# Altium PCB X3_Developer_RF_Sheet_V7.4.2_Sep2023.PcbDoc
Units mm, origin at the board's own origin, x right, y up, seen from the top; angles counter-clockwise.
Board outline 227.52 x 176.4 mm, 2 copper layers (Top Layer, Bottom Layer); 15 components, 0 nets, 38 pads, 0 vias.
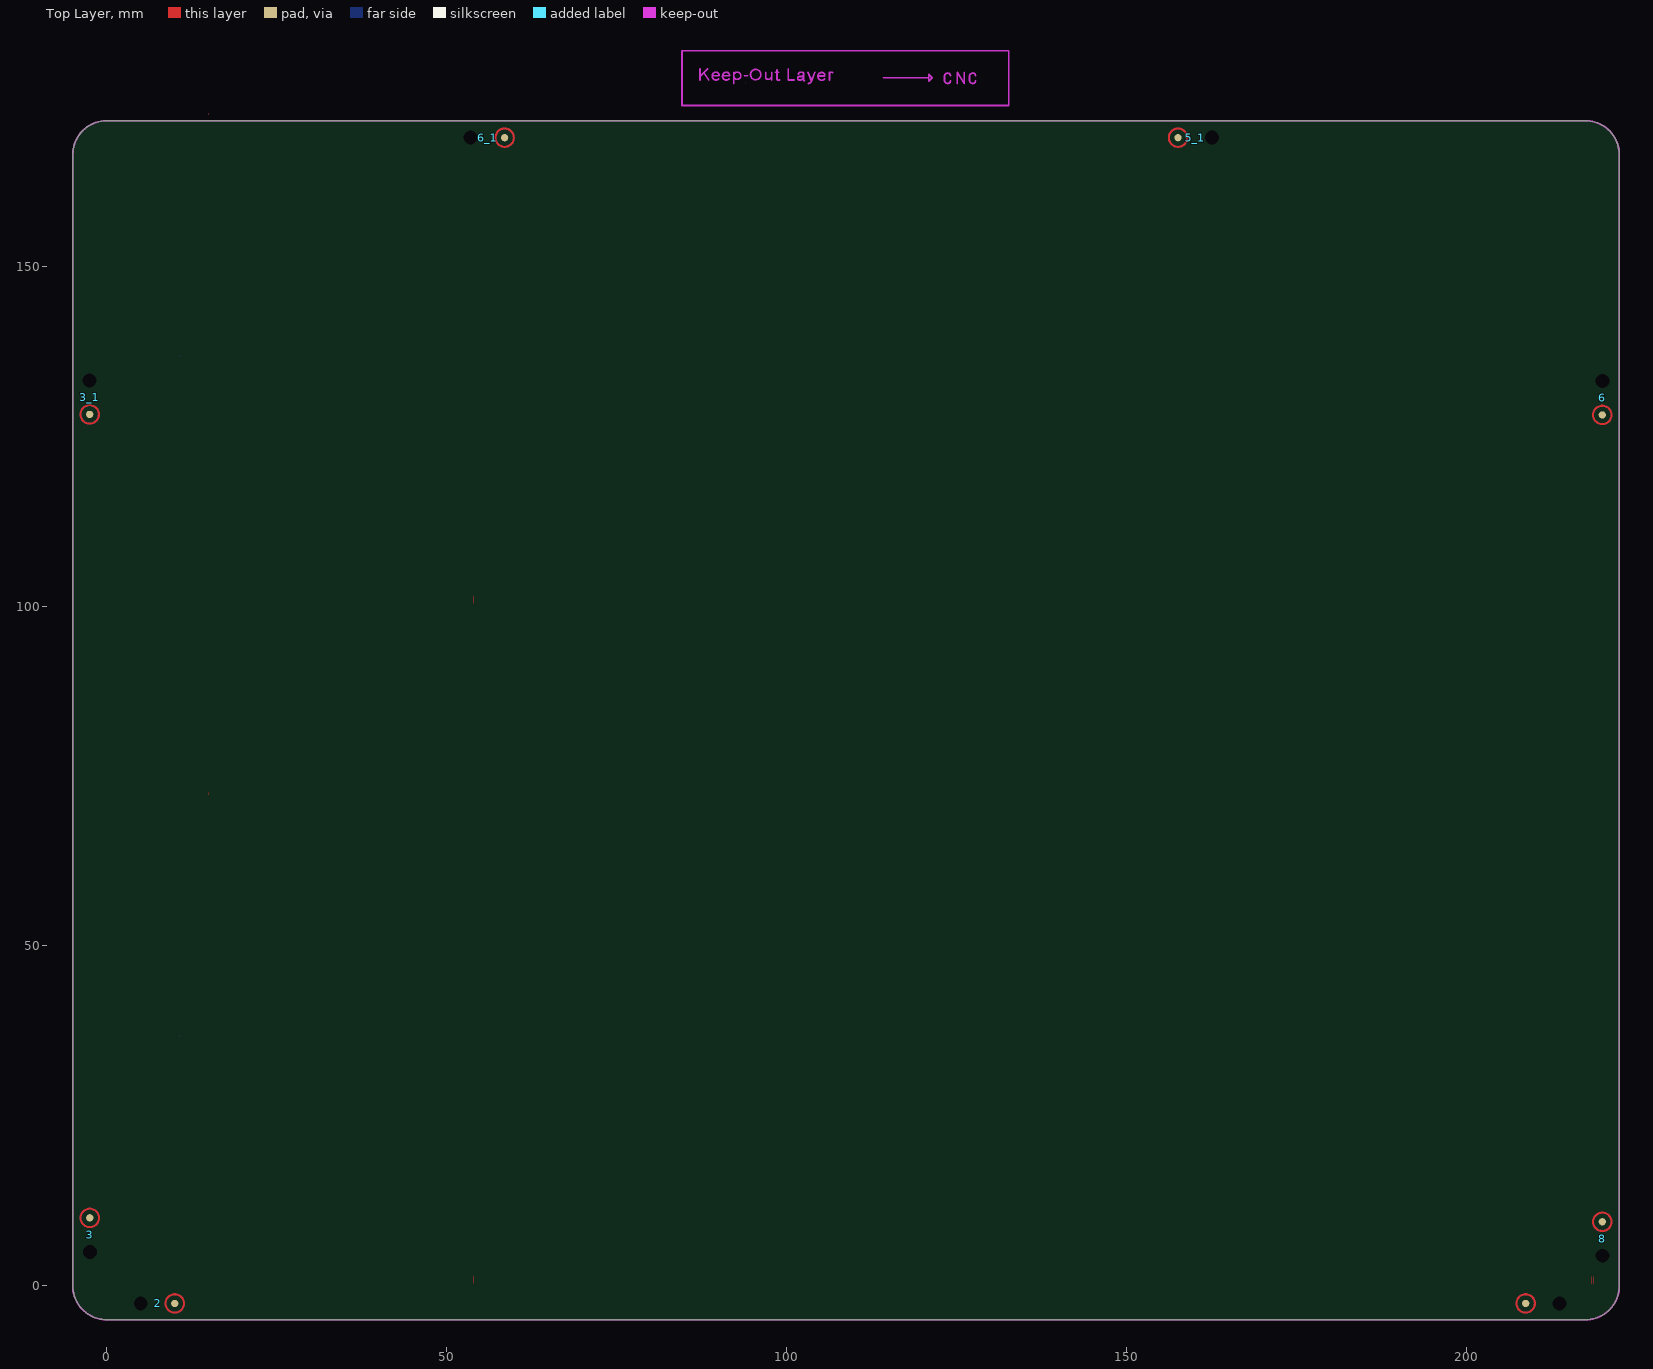
[diagram p0: Top Layer view]
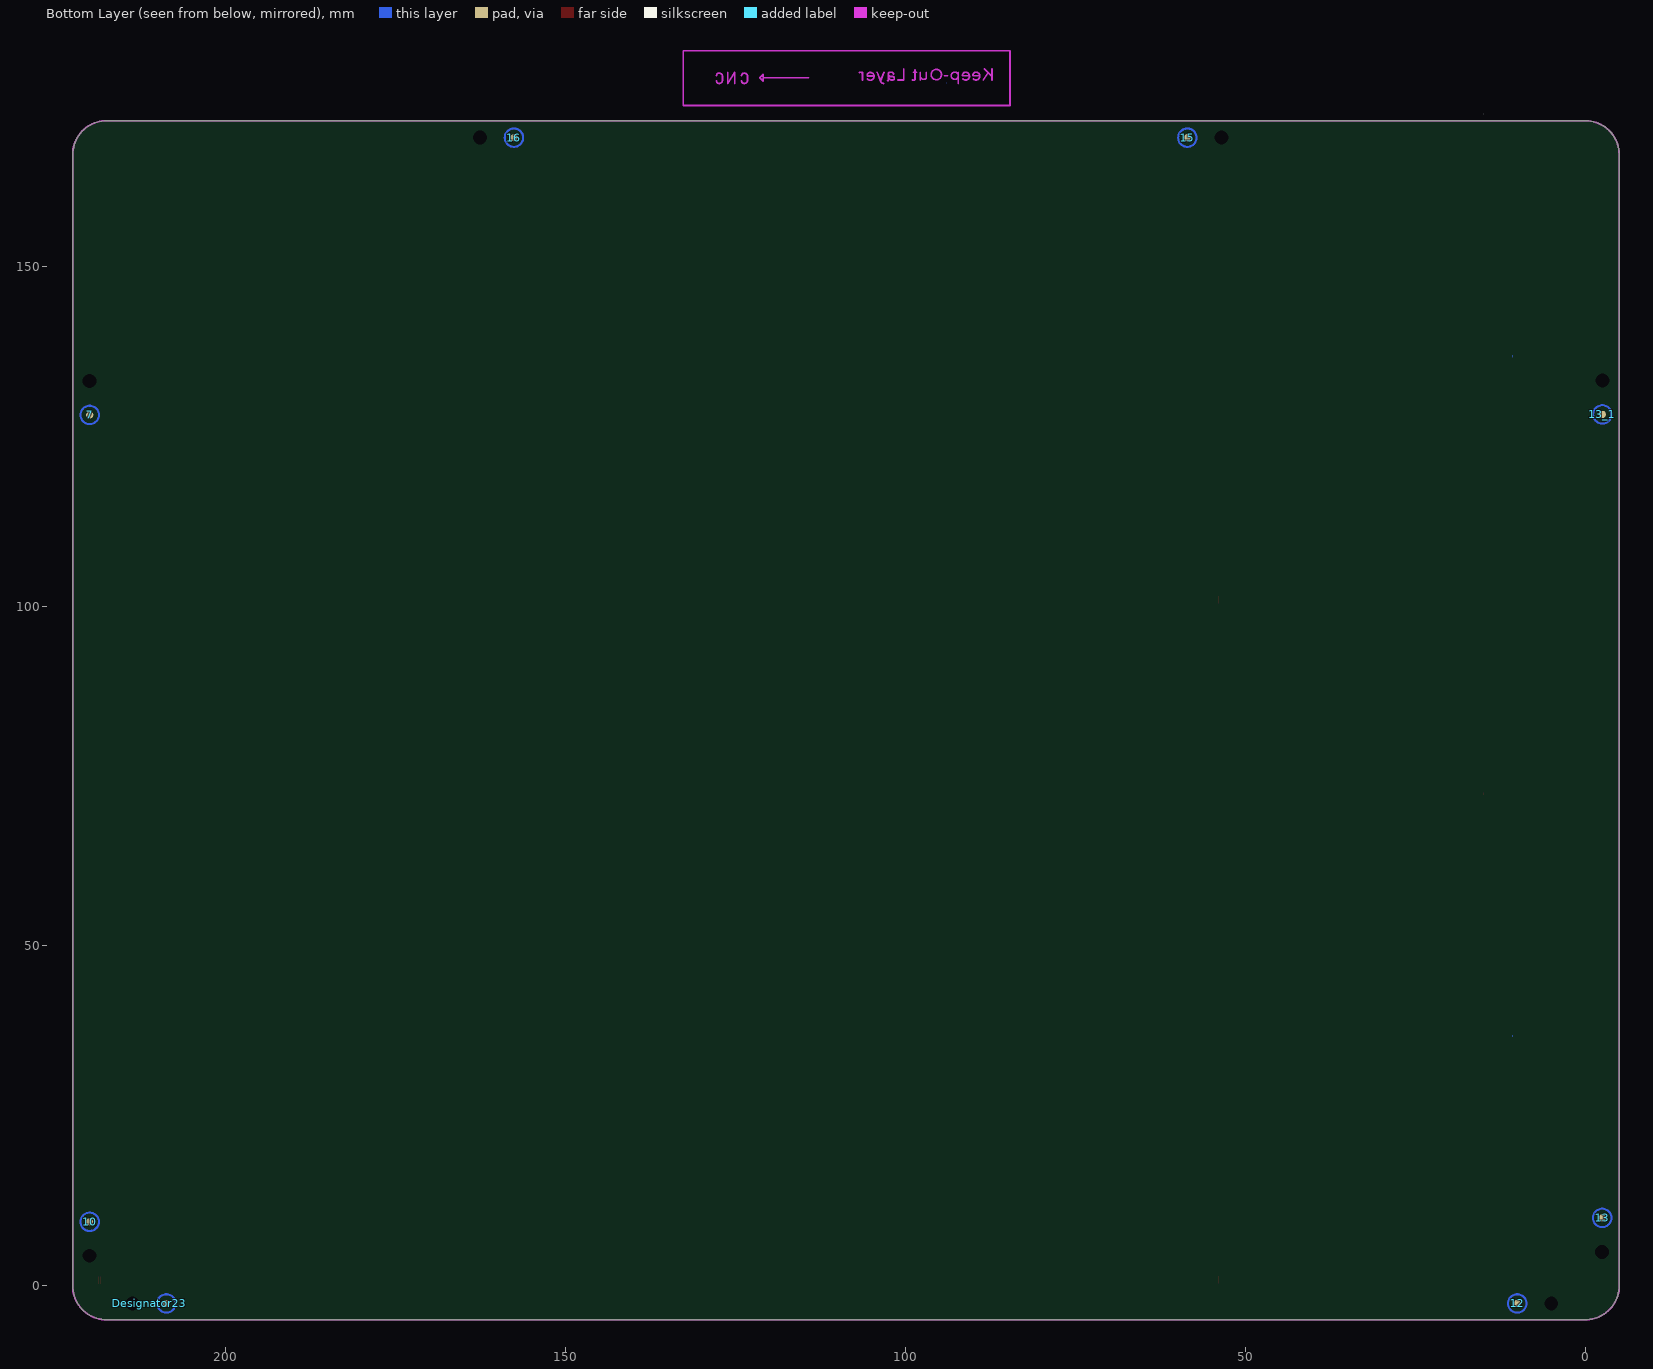
[diagram p1: Bottom Layer view, seen from below]

## Layer stack, top to bottom
Top Solder: solder mask 0.0102, Solder Resist, Dk 3.5
Top Layer: signal copper 0.0356
Dielectric 1: dielectric 0.32, FR-4, Dk 4.8
Bottom Layer: signal copper 0.0356
Bottom Solder: solder mask 0.0102, Solder Resist, Dk 3.5

## Board outline
-5.024,0 -5.005,166.401 -5,166.411 cw(c0,166.397) -0.084,171.396 -0.084,171.387 217.471,171.392 217.471,171.397 cw(c217.5,166.397) 222.5,166.423 222.501,166.423 222.5,0 cw(c217.5,-0.004) 217.5,-5.004 217.5,-5 0.092,-5 cw(c0.034,0.058)

## Design rules (kind name [scope] priority, off if disabled: settings)
Clearance [All] p1: gap=0.254 ignorepadtopadclearanceinfootprint=FALSE except(0: Arc-Hole Track-Hole SMDPad-Hole THPad-Hole Via-Hole Fill-Hole Poly-Hole Region-Hole Text-Hole)
PolygonConnect [All] p1: connectstyle=Relief reliefconductorwidth=0.254 reliefentries=4 polygonreliefangle="90 Angle" airgapwidth=0.254
RoutingVias [All] p1: holewidth=0.711 width=1.27 viastyle="Through Hole" minholewidth=0.711 minwidth=1.27 maxholewidth=0.711 maxwidth=1.27
SolderMaskExpansion [All] p1: expansion=0.102 istentingtop=FALSE
Width [All] p1: maxlimit=0.254 minlimit=0.254 preferedwidth=0.254
30 further rules are at their usual default settings.

## Components (designator, comment, footprint, x,y, rotation, side; value= is the part's Value field where it differs from the comment)
2 "Comment" Sheet_point#1 7.455,-2.587 r270 top
3 "Comment" Sheet_point#1 -2.501,7.46 r0 top
3_1 "Comment" Sheet_point#1 -2.522,130.732 r180 top
5_1 "Comment" Sheet_point#1 160.122,168.894 r90 top
6 "Comment" Sheet_point#1 219.996,130.656 r180 top
6_1 "Comment" Sheet_point#1 55.982,168.894 r270 top
7 "Comment" Sheet_point#2 219.996,130.656 r0 bottom
8 "Comment" Sheet_point#1 219.996,6.882 r0 top
10 "Comment" Sheet_point#2 219.996,11.962 r0 bottom
12 "Comment" Sheet_point#2 9.995,-0.047 r0 bottom
13 "Comment" Sheet_point#2 -2.501,12.54 r0 bottom
13_1 "Comment" Sheet_point#2 -2.522,125.652 r180 bottom
15 "Comment" Sheet_point#2 58.522,171.434 r0 bottom
16 "Comment" Sheet_point#2 157.582,171.434 r0 bottom
Designator23 "Comment" Sheet_Set-Point 211.219,-2.587 r270 bottom

## Footprints (in the part's own frame and the unit in brackets; to place one, negate y for a bottom-side part, rotate by r counter-clockwise, add the part's x,y. Pads: shape width x height; smd on the part's side, far side on the other; paste and mask are expansions set on the pad)
Sheet_point#1 [mm]
  round 1.068 smd mask+0.102: 0(0,2.54)
  round 2.5 on Top Solder: 0(0,2.54)
  round 2.5 on Bottom Solder: 0(0,2.54)
  round 0 hole 2.05 paste-1.279 mask-0.152: 1(0,-2.46)
  Top Layer circle w0.3: c0,2.54 r1.353
Sheet_point#2 [mm]
  round 1.068 smd mask+0.102: 0(0,2.54)
  Top Layer circle w0.3: c0,2.54 r1.353
Sheet_Set-Point [mm]
  round 1.068 smd far side mask+0.65: 0(0,2.5)
  round 1.068 smd mask+0.65: 0(0,2.5)
  round 0 hole 2.05 paste-1.279 mask-0.152: 1(0,-2.5)
  Top Layer circle w0.3: c0,2.5 r1.353
  Bottom Layer circle w0.3: c0,2.5 r1.353

## Nets (pads, with @x,y where several pads share a name; then routed paths per layer and width w, separated by ;. In a path a pad name is that pad's centre, name@x,y a point inside that pad or via, vN(x,y) a via of type N, cw(c..) or ccw(c..) an arc to the next point about the centre after c; other vN are vias at no path point)
pads on no net: 2.0 2.1 3.0 3.1 3_1.0 3_1.1 5_1.0 5_1.1 6.0 6.1 6_1.0 6_1.1 7.0 8.0 8.1 10.0 12.0 13.0 13_1.0 15.0 16.0 Designator23.0 Designator23.1

## Keep-outs
Keep-Out Layer:
  circle w0.254: c95.45,178.184 r0.762
  rectangle: 120.929,177.508 121.256,177.948
  lines w0.254: -5.005,166.401 -5.024,0 ccw(c0.034,0.058) 0.092,-5 217.5,-5 ; -5,166.411 cw(c0,166.397) -0.084,171.396 ; -0.084,171.387 217.471,171.392 ; 87.274,179.032 87.274,177.381 87.274,177.906 88.417,179.032 87.846,178.469 88.544,177.381 ; 90.031,177.546 cw(c89.624,177.952) 89.052,178.016 ; 91.555,177.546 cw(c91.148,177.952) 90.576,178.016 ; 92.227,176.873 92.227,178.524 ; 92.227,177.889 ccw(c92.74,178.012) 92.227,178.134 ; 93.751,178.016 94.259,178.016 ; 96.926,178.524 96.926,177.635 ccw(c97.307,178.016) 97.815,177.836 ; 97.815,177.381 97.815,178.524 ; 98.323,178.524 98.831,178.524 ; 98.577,178.905 98.577,177.508 ccw(c98.831,177.635) 98.958,177.381 ; 100.228,179.032 100.228,177.381 101.117,177.381 ; 101.752,178.27 cw(c102.006,178.27) 102.006,178.524 102.26,178.524 cw(c102.26,178.27) 102.514,178.27 ; 102.451,177.783 cw(c102.049,177.783) 102.049,177.381 101.879,177.381 cw(c101.879,177.635) 101.625,177.635 cw(c101.879,177.635) 101.879,177.889 102.133,177.889 ccw(c102.133,178.27) 102.514,178.27 ; 102.641,177.254 cw(c102.641,177.381) 102.514,177.381 102.514,178.27 ; 103.149,178.524 103.657,177.254 ; 103.171,176.873 ccw(c103.171,177.434) 103.568,177.037 ccw(c103.351,177.254) 103.657,177.254 ; 104.165,178.524 103.657,177.254 ; 105.585,177.516 cw(c105.178,177.922) 104.607,177.986 ; 106.324,177.381 106.324,178.524 ; 106.324,178.244 cw(c106.604,178.244) 106.781,178.461 ; 114.198,177.694 120.929,177.694 120.929,178.202 ; 124.104,177.254 cw(c123.723,177.254) 123.723,176.873 cw(c123.723,177.381) 123.215,177.381 123.215,177.889 cw(c123.723,177.889) 123.723,178.397 cw(c123.723,178.016) 124.104,178.016 ; 125.12,176.873 125.12,178.524 126.136,176.873 126.136,178.524 ; 127.787,177.254 cw(c127.406,177.254) 127.406,176.873 cw(c127.406,177.381) 126.898,177.381 126.898,177.889 cw(c127.406,177.889) 127.406,178.397 cw(c127.406,178.016) 127.787,178.016 ; 217.471,171.397 cw(c217.5,166.397) 222.5,166.423 ; 217.5,-5.004 ccw(c217.5,-0.004) 222.5,0 222.501,166.423 ; 89.052,178.016 cw(c89.624,177.952) 89.687,178.524 cw(c89.624,178.079) 90.068,178.016 89.052,178.016 ; 90.576,178.016 cw(c91.148,177.952) 91.211,178.524 cw(c91.148,178.079) 91.592,178.016 90.576,178.016 ; 104.607,177.986 cw(c105.178,177.922) 105.242,178.494 cw(c105.178,178.049) 105.623,177.986 104.607,177.986 ; 120.929,178.202 120.929,177.186 121.437,177.694 120.929,178.202 ; 84.607,173.63 84.607,181.699 132.662,181.699 132.662,173.63 84.607,173.63

## Silkscreen, mask and mechanical layers (free items; w line width, h text height)
Top Overlay:
Bottom Overlay:
Mechanical 15:
  rectangle: 121.133,185.893 121.315,186.38
  lines w0.254: -5.024,0 222.5,0 ; -5.017,41.6 222.501,41.6 ; -5.017,83.201 222.501,83.201 ; -5.017,124.801 222.501,124.801 ; -5.017,166.401 222.501,166.401 ; 0,-5 0,171.389 ; 43.5,-4.993 43.5,171.389 ; 87,-4.993 87,171.389 ; 114.33,186.126 121.569,186.126 ; 130.5,-4.993 130.5,171.389 ; 174,-4.993 174,171.389 ; 217.5,-4.993 217.5,171.389 ; 121.569,186.126 121.061,185.618 121.061,186.634 121.569,186.126 ; 84.608,182.13 132.662,182.13 132.662,190.2 84.608,190.2 84.608,182.13
  text "Mechanical 15 Layer" at 87.196,185.676 h3
  text "V-Cut" at 123.137,185.143 h3

## Panel: embedded boards
"X3_Developer_RF_Output_V7.4.2_Nov2023_1402.06.07.PcbDoc" at 0,0, 4 rows x 5 columns, spacing 41.6 x 43.5, rotation 0